# Altium PCB AudioPCB3.PcbDoc
Units mil, origin at the board's own origin, x right, y up, seen from the top; angles counter-clockwise.
Board outline 3937.01 x 3149.61 mil, 2 copper layers (Top Layer, Bottom Layer); 64 components, 36 nets, 148 pads, 0 vias.
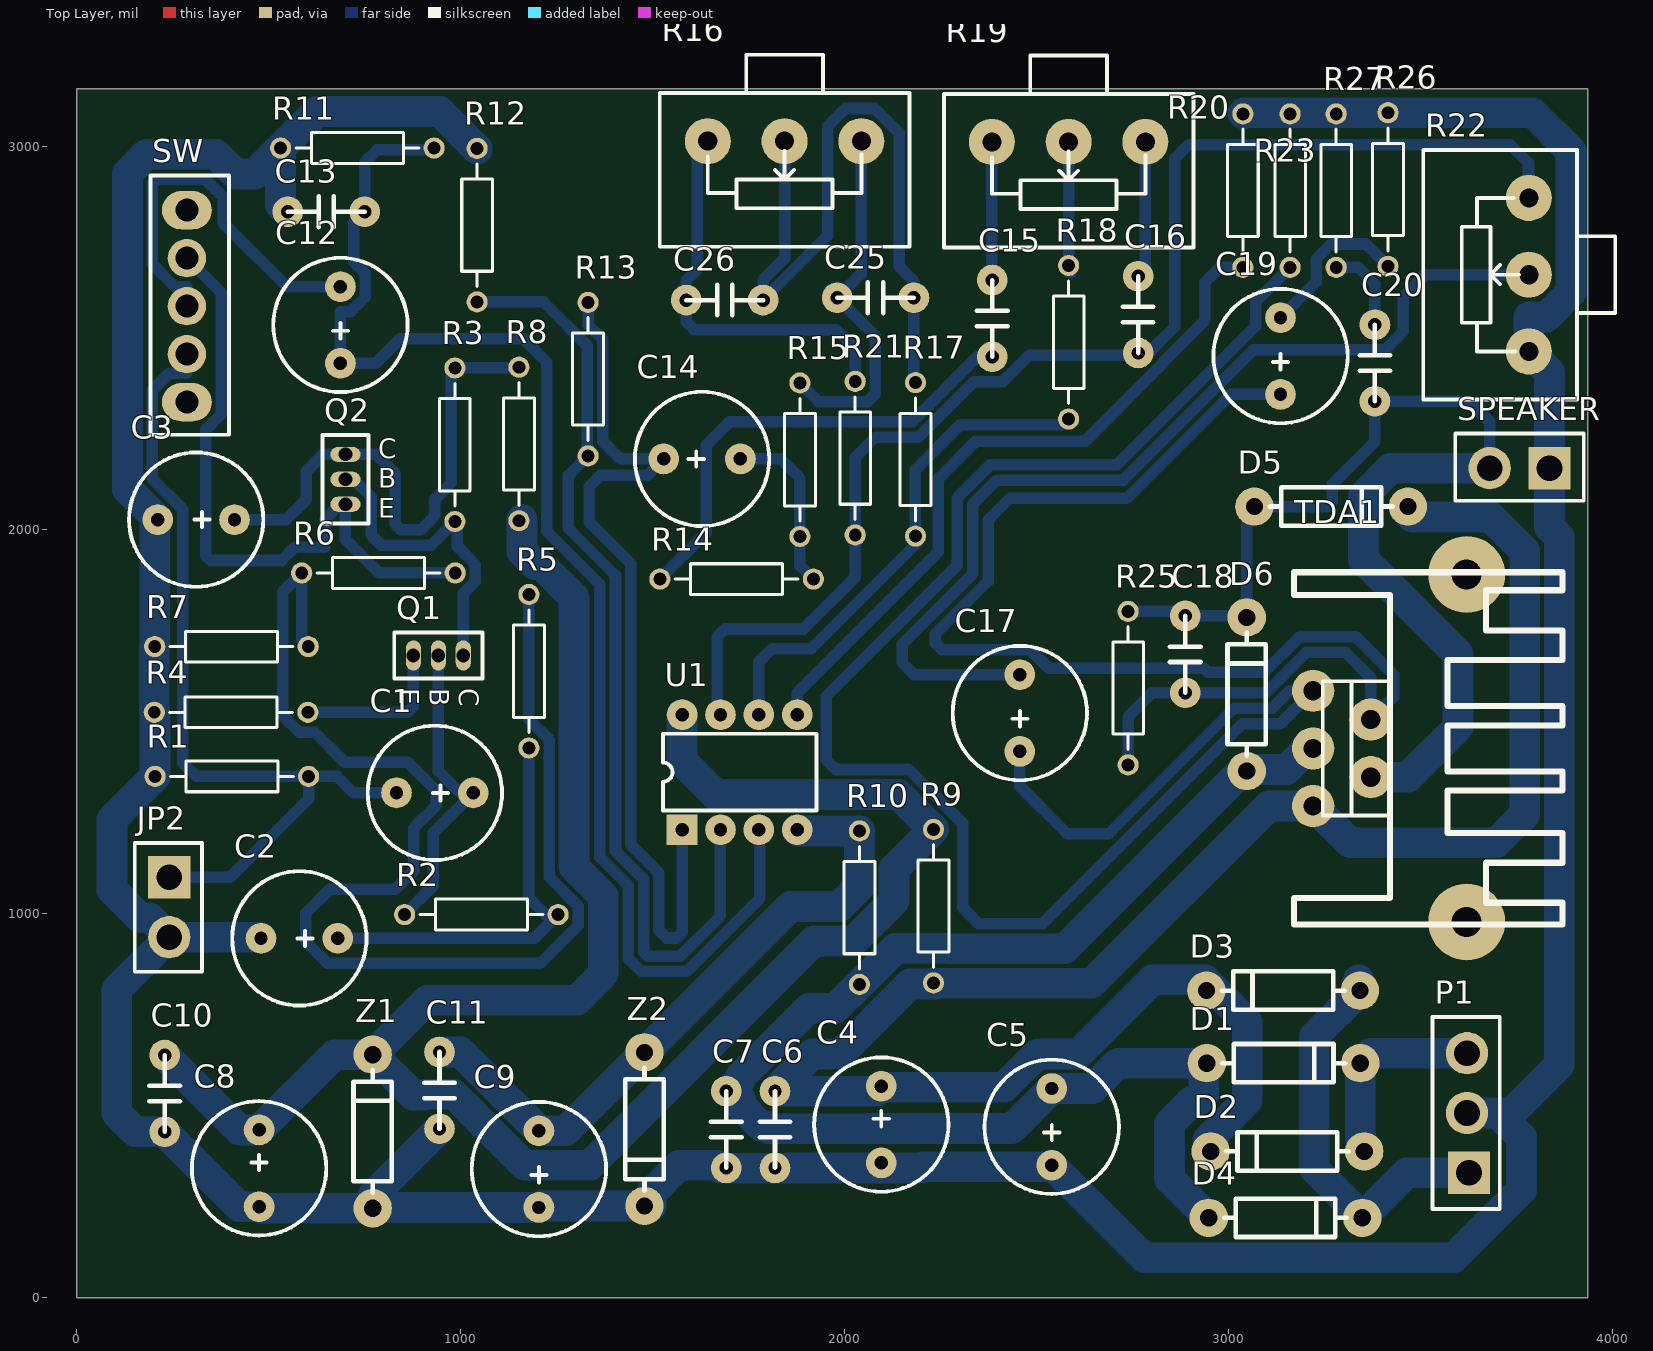
[diagram p0: Top Layer view]
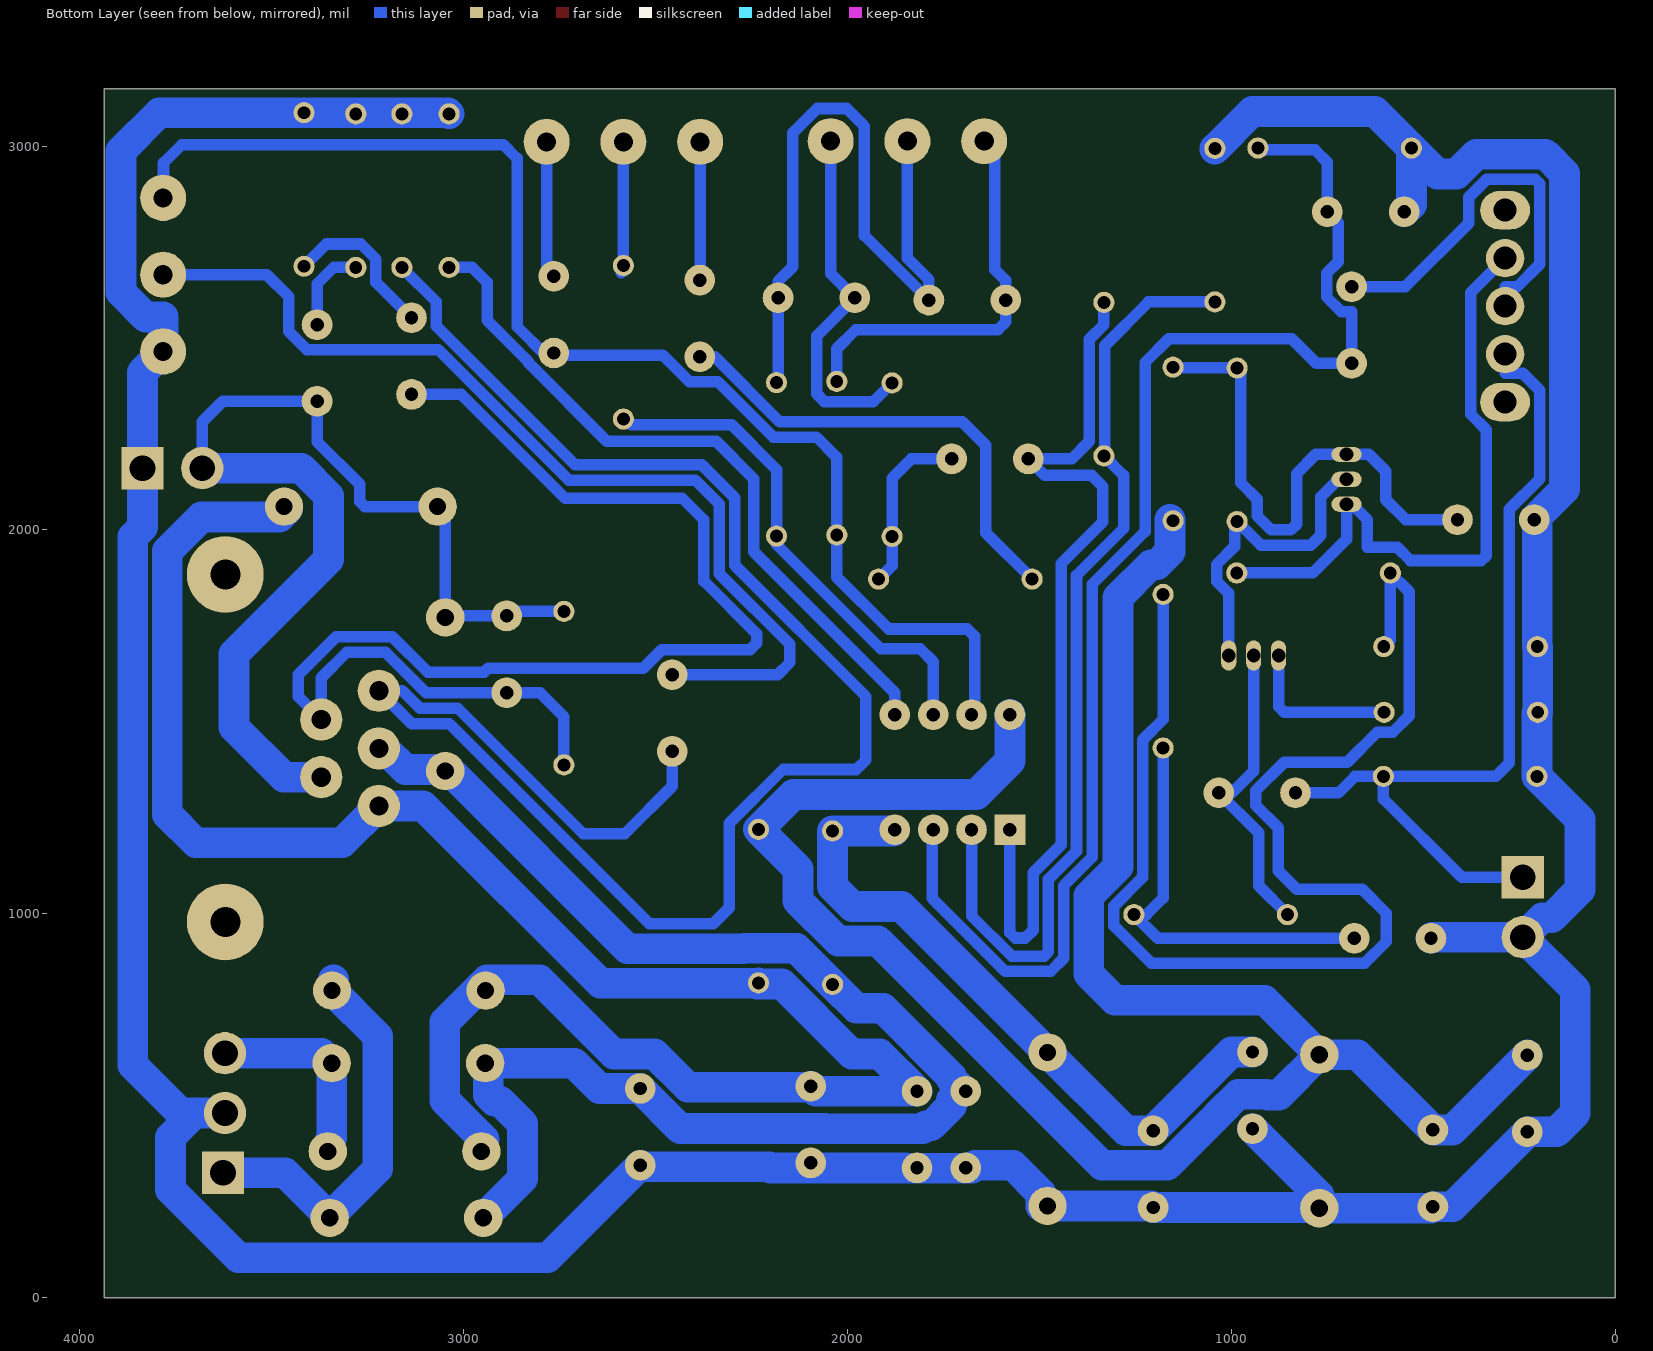
[diagram p1: Bottom Layer view, seen from below]

## Layer stack, top to bottom
Top Solder: solder mask 0.4, Solder Resist, Dk 3.5
Top Layer: signal copper 1.4
Dielectric 1: dielectric 12.6, FR-4, Dk 4.8
Bottom Layer: signal copper 1.4
Bottom Solder: solder mask 0.4, Solder Resist, Dk 3.5

## Board outline
0,0 3937.01,0 3937.01,3149.61 0,3149.61

## Design rules (kind name [scope] priority, off if disabled: settings)
Clearance [All] p1: gap=10 ignorepadtopadclearanceinfootprint=FALSE except(0: Arc-Hole Track-Hole SMDPad-Hole THPad-Hole Via-Hole Fill-Hole Poly-Hole Region-Hole Text-Hole)
PolygonConnect [All] p1: connectstyle=Relief reliefconductorwidth=10 reliefentries=4 polygonreliefangle="90 Angle" airgapwidth=10
RoutingVias [All] p1: holewidth=28 width=50 viastyle="Through Hole" minholewidth=28 minwidth=50 maxholewidth=28 maxwidth=50
SilkToSilkClearance [All] p1: silktosilkclearance=0
SilkToSolderMaskClearance [IsPad] p1: minsilkscreentomaskgap=0 clearancetoexposedcopper=TRUE
SolderMaskExpansion [All] p1: expansion=4
Width [All] p1: maxlimit=80 minlimit=30 preferedwidth=30 toplayer_maxwidth=30 minimp=50.000000 maximp=50.000000 favimp=50.000000
Width NETD3_1 [InNet('NetD3_1')] p2: maxlimit=80 minlimit=80 preferedwidth=80 minimp=50.000000 maximp=50.000000 favimp=50.000000
Width NETD1 [InNet('NetD1_2')] p3: maxlimit=80 minlimit=80 preferedwidth=80 minimp=50.000000 maximp=50.000000 favimp=50.000000
Width +9V_1 [InNet('+9V')] p4: maxlimit=80 minlimit=80 preferedwidth=80 minimp=50.000000 maximp=50.000000 favimp=50.000000
Width -9V [InNet('-9V')] p5: maxlimit=80 minlimit=80 preferedwidth=80 minimp=50.000000 maximp=50.000000 favimp=50.000000
Width GND [InNet('GND')] p6: maxlimit=80 minlimit=80 preferedwidth=80 minimp=50.000000 maximp=50.000000 favimp=50.000000
28 further rules are at their usual default settings.

## Components (designator, comment, footprint, x,y, rotation, side; value= is the part's Value field where it differs from the comment)
C1 "2U2" CD0.2 1033,1315 r180 top
C2 "2U2" CD0.2 680,936 r180 top
C3 "220U" CD0.2 411,2027 r180 top
C4 "2200U" CD0.2 2096,551 r270 top
C5 "2200U" CD0.2 2540,345 r90 top
C6 "0.1" C0.2A 1819,338 r90 top
C7 "0.1" C0.2A 1692,538 r270 top
C8 "220U" CD0.2 475,437 r270 top
C9 "220U" CD0.2 1204,235 r90 top
C10 "0.1" C0.2A 229,632 r270 top
C11 "0.1" C0.2A 945,440 r90 top
C12 "2.2U" CD0.2 687,2434 r90 top
C13 "470P" C0.2A 550,2829 r0 top
C14 "2.2U" CD0.2 1529,2185 r0 top
C15 "3300P" C0.2A 2385,2451 r90 top
C16 "3300P" C0.2A 2765,2661 r270 top
C17 "10U" CD0.2 2457,1423 r90 top
C18 "270P" C0.2A 2888,1576 r90 top
C19 "47U" CD0.2 3136,2353 r90 top
C20 "0.22U" C0.2A 3382,2535 r270 top
C25 "0.033U" C0.2A 1981,2605 r0 top
C26 "0.033U" C0.2A 1788,2599 r180 top
D1 "Diode 1N4001" DIODE0.4 2944,611 r0 top
D2 "Diode 1N4001" DIODE0.4 3354,381 r180 top
D3 "Diode 1N4001" DIODE0.4 3343,800 r180 top
D4 "Diode 1N4001" DIODE0.4 2949,208 r0 top
D5 "4148" DIODE0.4 3068,2061 r0 top
D6 "4148" DIODE0.4 3048,1372 r90 top
JP2 "Header 2" p2 241,939.09 r270 top
P1 "Header 3" p3 3622,481 r90 top
Q1 "9014" TO-226-AA 942,1673 r270 top
Q2 "9014" TO-226-AA 700,2132 r0 top
R1 "18K" AXIAL-0.4 404,1358 r0 top
R2 "20K" AXIAL-0.4 1054,998 r180 top
R3 "5K1" AXIAL-0.4 985,2222 r90 top
R4 "100" AXIAL-0.4 402,1525 r0 top
R5 "20K" AXIAL-0.4 1178,1632 r90 top
R6 "1K5" AXIAL-0.4 786,1888 r0 top
R7 "1K5" AXIAL-0.4 403,1696 r0 top
R8 "5.1K" AXIAL-0.4 1152,2224 r270 top
R9 "220" AXIAL-0.4 2232,1020 r90 top
R10 "220" AXIAL-0.4 2039,1016 r90 top
R11 "22K" AXIAL-0.4 731,2995 r0 top
R12 "22K" AXIAL-0.4 1043,2794 r270 top
R13 "220K" AXIAL-0.4 1332,2393 r90 top
R14 "10K" AXIAL-0.4 1719,1872 r0 top
R15 "10K" AXIAL-0.4 1884,2183 r90 top
R16 "100K" LK01 1844,3013 r0 top
R17 "10K" AXIAL-0.4 2185,2184 r90 top
R18 "3K3" AXIAL-0.4 2584,2489 r270 top
R19 "100K" LK01 2584,3011 r0 top
R20 "39K" AXIAL-0.4 3038,2884 r270 top
R21 "10K" AXIAL-0.4 2028,2187 r270 top
R22 "22K" LK01 3783,2665 r270 top
R23 "22K" AXIAL-0.4 3161,2884 r270 top
R25 "22K" AXIAL-0.4 2739,1588 r90 top
R26 "1K" AXIAL-0.4 3416,2887 r270 top
R27 "1K" AXIAL-0.4 3281,2884 r270 top
SPEAKER "Speaker" p2 3681,2161 r180 top
SW "SW-SPDT" SW 287,2583 r0 top
TDA1 "TDA2030" 7805E 3371,1531 r180 top
U1 "NE5532" DIP8 1577,1219 r90 top
Z1 "9V" DIODE0.4 771,233 r90 top
Z2 "9V" DIODE0.4 1479,639 r270 top

## Footprints (in the part's own frame and the unit in brackets; to place one, negate y for a bottom-side part, rotate by r counter-clockwise, add the part's x,y. Pads: shape width x height; smd on the part's side, far side on the other; paste and mask are expansions set on the pad)
7805E [mil]
  round 110 hole 50: 1(150,-50) 2(0,25) 3(150,100) 4(0,175) 5(150,250)
  round 200 hole 78: ""(-250,552) ""(-250,-353)
  silkscreen extent -500,-359 200,559
AXIAL-0.4 [mm]
  round 1.4 hole 0.85: 1(-5.08,0) 2(5.08,0)
  silkscreen extent -4.06,-1.02 4.06,1.02
C0.2A [mil]
  round 80 hole 35: 1(0,0) 2(200,0)
  silkscreen extent 0,-40 200,40
CD0.2 [mil]
  round 80 hole 35: 1(0,0) 2(200,0)
  silkscreen extent -75,-175 275,175
DIODE0.4 [mil]
  round 100 hole 45: 1(0,0) 2(400,0)
  silkscreen extent 40,-50 360,50
DIP8 [mil]
  rect 80x80 hole 35: 1(0,0)
  round 80 hole 35: 2(0,-100) 3(0,-200) 4(0,-300) 5(300,-300) 6(300,-200) 7(300,-100) 8(300,0)
  silkscreen extent 50,-350 250,50
LK01 [mil]
  round 120 hole 50: 1(200,0) 2(-200,0) 3(0,0)
  silkscreen extent -325,-275 325,225
p2 [mm]
  round 2.8 hole 1.7: 1(0,0)
  rect 2.8x2.8 hole 1.7: 2(-3.96,0)
  silkscreen extent -6.22,-2.29 2.29,2.16
p3 [mm]
  rect 2.8x2.8 hole 1.7: 1(-3.96,-0.127)
  round 2.8 hole 1.7: 2(0,0) 3(3.96,0)
  silkscreen extent -6.35,-2.16 6.35,2.29
SW [mil]
  round 100 hole 60: 1(0,125) 2(0,0) 3(0,-125)
  oval 130x100 hole 60: 4(0,250) 5(0,-250)
  silkscreen extent -95,-335 110,340
TO-226-AA [mm]
  oval 2x1 hole 0.9: 1(0,-1.651) 2(0,0) 3(0,1.651)
  silkscreen extent -1.52,-2.92 1.52,2.92

## Part data
C1 C2 C3 C4 C5 C8 C9 C12 C14 C17 C19: library part "Cap Pol1", "Polarized Capacitor (Radial)", LatestRevisionDate=17-Jul-2002, LatestRevisionNote="Re-released for DXP Platform.", PackageReference=RB7.6-15, Published=8-Jun-2000, Publisher="Altium Limited"
C6 C7 C10 C11 C13 C15 C16 C18 C20 C25 C26: library part Cap, "Capacitor", LatestRevisionDate=17-Jul-2002, LatestRevisionNote="Re-released for DXP Platform.", PackageReference=RAD-0.3, Published=8-Jun-2000, Publisher="Altium Limited"
D1 D2 D3 D4: "1 Amp General Purpose Rectifier", Code_JEDEC=DO-204-AL, ComponentLink1Description="Manufacturer Link", ComponentLink1URL=http://www.fairchildsemi.com/, ComponentLink2Description=Datasheet, ComponentLink2URL=http://www.fairchildsemi.com/ds/1N%2F1N4001.pdf, DatasheetVersion=1998, LatestRevisionDate=17-Jul-2002, LatestRevisionNote="Re-released for DXP Platform.", PackageReference=DO-41, PackageVersion=Aug-1999, Published=8-Jun-2000, Publisher="Altium Limited"
D5 D6: library part "Diode 1N4148", "High Conductance Fast Diode", Code_JEDEC=DO-204-AH, ComponentLink1Description="Manufacturer Link", ComponentLink1URL=http://www.fairchildsemi.com/, ComponentLink2Description=Datasheet, ComponentLink2URL=http://www.fairchildsemi.com/ds/1N%2F1N4148.pdf, DatasheetVersion=1997, LatestRevisionDate=17-Jul-2002, LatestRevisionNote="Re-released for DXP Platform.", PackageReference=DO-35, Published=8-Jun-2000, Publisher="Altium Limited"
JP2: "Header, 2-Pin", LatestRevisionDate=17-Jul-2002, LatestRevisionNote="Re-released for DXP Platform.", Publisher="Altium Limited"
P1: "Header, 3-Pin", LatestRevisionDate=17-Jul-2002, LatestRevisionNote="Re-released for DXP Platform.", Publisher="Altium Limited"
Q1 Q2: library part 2N3904, "NPN General Purpose Amplifier", Code_JEDEC=TO-92A, ComponentLink1Description="Manufacturer Link", ComponentLink1URL=http://www.fairchildsemi.com/, ComponentLink2Description=Datasheet, ComponentLink2URL=http://www.fairchildsemi.com/ds/2N%2F2N3904.pdf, DatasheetVersion=1997, LatestRevisionDate=15-Jan-2003, LatestRevisionNote="PCB Footprint 'BCY-W3/D4.7' replaced", PackageReference=TO-92A, PackageVersion=Sep-1998, Published=8-Jun-2000, Publisher="Altium Limited"
R1 R2 R3 R4 R5 R6 R7 R8 R9 R10 R11 R12 R13 R14 R15 R17 R18 R20 R21 R23 R25 R26 R27: library part Res2, "Resistor", LatestRevisionDate=17-Jul-2002, LatestRevisionNote="Re-released for DXP Platform.", PackageReference=AXIAL-0.4, Published=8-Jun-2000, Publisher="Altium Limited"
R16 R19 R22: library part RPot, "Potentiometer", LatestRevisionDate=17-Jul-2002, LatestRevisionNote="Re-released for DXP Platform.", PackageDescription="Variable Resistor, Thru-Hole; 3 Leads", PackageReference=VR5, Published=8-Jun-2000, Publisher="Altium Limited", Set Position=0.5, Sim Note="Enter the Resistance value and the set point into parameter fields."
SPEAKER: "Loudspeaker", LatestRevisionDate=17-Jul-2002, LatestRevisionNote="Re-released for DXP Platform.", PackageReference=PIN2, Published=24-Mar-1999, Publisher="Altium Limited"
SW: "SPDT Subminiature Toggle Switch, Right Angle Mounting, Vertical Actuation", ComponentLink1Description="Manufacturer Link", ComponentLink1URL=http://www.apem.com, DatasheetVersion=05-Dec-2000, LatestRevisionDate=17-Dec-2003, LatestRevisionNote="Schematic revised, PCB Footprint replaced.", PackageReference=TL36WW15050, Published=24-Mar-1999, Publisher="Altium Limited"
Z1 Z2: library part "D Zener", "Zener Diode", LatestRevisionDate=17-Jul-2002, LatestRevisionNote="Re-released for DXP Platform.", PackageReference=DIODE-0.7, Published=8-Jun-2000, Publisher="Altium Limited"

## Nets (pads, with @x,y where several pads share a name; then routed paths per layer and width w, separated by ;. In a path a pad name is that pad's centre, name@x,y a point inside that pad or via, vN(x,y) a via of type N, cw(c..) or ccw(c..) an arc to the next point about the centre after c; other vN are vias at no path point)
+9V: C8.1 C10.1 R8.2 R9.2 U1.8 Z1.2 | length 5515.5
  Bottom Layer w80: C10.1 424,437 C8.1 671,633 Z1.2 ; R8.2@1160,2027 1160,1943.56 1194,1909.56 1210.13,1909.56 1295.56,1824.13 1295.56,1122.7 1371.56,1046.69 1371.56,843.56 1303,775 913,775 Z1.2 ; U1.8 1577,1398 1664,1311 2141,1311 R9.2 2129,1117 2129,1033.72 2024.28,929 1921,929 1337,345 1166.72,345 1035,476.72 1035,477.28 982.28,530 907.72,530 905.72,528 876,528 Z1.2
-9V: C9.2 C11.2 R10.2 U1.4 Z2.1 | length 1750.9
  Bottom Layer w30: U1.4 U1.4@1880,1216
  Bottom Layer w80: C11.2 999.56,640 1204,435.56 C9.2 1275,435 Z2.1 1859,1019 1987,1019 2039,1071 R10.2 U1.4@1880,1216
GND: C2.2 C3.2 C4.2 C5.1 C6.1 C7.2 C8.2 C9.1 C10.2 C11.1 C13.1 JP2.1 P1.2 R1.1 R4.1 R7.1 R11.1 R12.1 R20.1 R22.1 R23.1 R26.1 R27.1 SPEAKER.2 Z1.1 Z2.2 | length 12314.6
  Bottom Layer w80: C2.2 476.91,939.09 JP2.1 ; C13.1 531,2848 R11.1 ; C11.1 771,266 Z1.1 ; R12.1 1043,2992.68 945.68,3090 626,3090 R11.1 ; Z2.2 1208,239 C9.1 773,235 Z1.1 ; Z2.2@1497,239 1497,273 1569,345 1668,345 1676,337 1819,337 1850,337 1851,338 2201,338 2204,341 C5.1@2544,341 ; C5.1 C5.1@2544,341 ; R20.1 3041,3087 3793,3087 3893,2987 3893,2619.44 3828.56,2555 3783,2555 R22.1 3836.91,2411.09 SPEAKER.2 3836.91,2007.51 3862,1982.41 3862,606 3737,481 3701,481 ; P1.2 3701,481 ; JP2.1 190.21,989.88 165.17,989.88 92,1063.05 92,1246 R1.1 204,1523 R4.1 202,1695 R7.1 203,2019 C3.2 132,2106 132,2928.96 182.08,2979.03 361.89,2979.03 413.48,2927.44 463.44,2927.44 R11.1 ; JP2.1 104,802.09 104,481 153,432 C10.2 424,237 C8.2 479,233 Z1.1 ; C5.1@2544,341 2781,104 3586.85,104 3764,281.15 3764,418 3701,481
NetC1_1: C1.1 Q1.2 R2.2 | length 806.8
  Bottom Layer w30: R2.2 929,1073 929,1211 C1.1 999,1315 942,1372 Q1.2
NetC1_2: C1.2 JP2.2 R1.2 SW.3 | length 2257.8
  Bottom Layer w30: JP2.2 400,1095 604,1299 R1.2 ; SW.3 287,2408 240.93,2408 197,2364.07 197,2132.92 276,2053.92 276,1393 311,1358 R1.2 ; C1.2 721,1315 678,1358 R1.2
NetC2_1: C2.1 R2.1 R5.1 | length 1084.5
  Bottom Layer w30: C2.1 1192,936 R2.1 1221,998 1178,1041 R5.1
NetC3_1: C3.1 Q2.3 R3.2 R8.1 | length 1393.6
  Bottom Layer w30: C3.1 546,2027 598,2079 598,2153 642,2197 Q2.3 780,2197 830,2147 830,2015 845,2000 896,2000 932.44,2036.44 932.44,2080 976,2123.56 976,2413 R3.2 1155,2422 R8.1@1160,2427
NetC12_1: C12.1 C13.2 R11.2 U1.3 | length 3631.9
  Bottom Layer w30: R11.2 926,2990 782,2990 750,2958 C13.2 721.92,2800.92 721.92,2699 752,2668.92 752,2607.08 713.92,2569 687,2569 C12.1 779,2434 843,2498 1163.33,2498 1225,2436.33 1225,1996 1363,1858 1363,1147.18 1436.56,1073.62 1436.56,884.44 1471,850 1589,850 1779,1040 1779,1217 U1.3
NetC12_2: C12.2 SW.2 | length 1025.3
  Bottom Layer w30: SW.2 287,2633 255.93,2633 197,2691.94 197,2902.03 209,2914.03 334.97,2914.03 382,2867 382,2798.94 546.94,2634 C12.2
NetC14_1: C14.1 R13.2 U1.1 | length 2353
  Bottom Layer w30: R13.2 1332,2534.57 1370,2496.57 1370,2231 1416,2185 C14.1 1486,2142 1364,2142 1335,2113 1335,2021 1443.5,1912.5 1443.5,1179.81 1516.56,1106.76 1516.56,957.44 1537,937 1562.86,937 1577,951.14 U1.1
NetC14_2: C14.2 R14.2 R15.1 | length 453.2
  Bottom Layer w30: C14.2 1834,2185 1884,2135 R15.1 1884,1907 R14.2
NetC15_1: C15.1 R14.1 | length 1239.4
  Bottom Layer w30: R14.1 1640,1993 1640,2221 1701,2282 2177,2282 2346,2451 C15.1
NetC15_2: C15.2 R19.2 | length 360.4
  Bottom Layer w30: R19.2 2384,2652 C15.2
NetC16_1: C16.1 R19.1 | length 355.7
  Bottom Layer w30: R19.1 2784,2661 C16.1@2788,2657
NetC16_2: C16.2 R21.2 R22.2 U1.7 | length 3401.4
  Bottom Layer w30: U1.7 1669,1527 1669,1723 1688,1742 1893,1742 2028,1877 R21.2 2028,2189 2081,2242 2193.57,2242 2337.57,2386 2411.92,2386 2481,2455.08 2786.08,2455.08 2861,2530 2861,2967.79 2897.21,3004 3734,3004 3782,2956 3782,2866 R22.2
NetC17_1: C17.1 R23.2 TDA1.1 | length 4863.3
  Bottom Layer w30: C17.1 2457,1332 2580,1209 2689,1209 3016,1536 3114.57,1536 3159.57,1581 TDA1.1 3135,1495 3037,1495 2516,974 2350,974 2308,1016 2308,1235.92 2167.92,1376 1977,1376 1952,1401 1952,1566 2294,1908 2294,2084 2380,2170 2710,2170 3071,2531 3071,2594 R23.2
NetC17_2: C17.2 R22.3 | length 2558.7
  Bottom Layer w30: C17.2 2182,1623 2150,1655 2150,1702 2334,1886 2334,2067.43 2396.57,2130 2726.57,2130 3066.57,2470 3408.92,2470 3456,2517.08 3456,2608 3513,2665 R22.3
NetC18_1: C18.1 C19.1 R25.1 TDA1.2 | length 3685.6
  Bottom Layer w30: R25.1 2739,1514 2801,1576 C18.1 3098,1576 3203,1681 3305,1681 3371,1615 TDA1.2 3431,1566 3431,1623 3332,1722 3186,1722 3093,1629 2947,1629 2936,1640 2531.92,1640 2483.92,1688 2254,1688 2237,1705 2237,1730 2374,1867 2374,2026 2430,2082 2735.14,2082 3006.14,2353 C19.1
NetC18_2: C18.2 C20.2 D5.1 D6.2 R25.2 SPEAKER.1 TDA1.4 | length 2915
  Bottom Layer w30: R25.2 2876,1788 C18.2 3044,1776 D6.2 3048,2041 D5.1 3258,2061 3271,2074 3271,2119 3382,2230 C20.2 3628,2335 3681,2282 SPEAKER.1
  Bottom Layer w80: TDA1.4 3468,1356 3598.22,1486.22 3598.22,1676.78 3352,1923 3352,2089 3424,2161 SPEAKER.1
NetC19_2: C19.2 R26.2 | length 418.9
  Bottom Layer w30: C19.2 3228.44,2645.44 3228.44,2705.77 3267.67,2745 3358,2745 R26.2
NetC20_1: C20.1 R27.2 | length 224.8
  Bottom Layer w30: R27.2 3339,2684 3382,2641 C20.1
NetC25_1: C25.1 R15.2 R16.1 | length 950.7
  Bottom Layer w30: R15.2 1932.56,2334.44 2060.33,2334.44 2080.56,2354.67 2080.56,2505.44 C25.1 2044,2668 R16.1
NetC25_2: C25.2 C26.1 R16.3 R17.2 | length 1859.9
  Bottom Layer w30: R16.3 1844,2708 1788,2652 C26.1 1956,2767 1956,3052 2002,3098 2079.21,3098 2143,3034.21 2143,2686 2181,2648 C25.2 2181,2388 R17.2
NetC26_2: C26.2 R16.2 R21.1 | length 1048.2
  Bottom Layer w30: R16.2 1616,2985 1616,2678 1588,2650 C26.2 1588,2542 1608,2522 1978,2522 2028,2472 R21.1
NetD1_2: D1.2 D2.1 P1.3 | length 489
  Bottom Layer w80: D2.1@3347,412 3344,415 D1.2 3369.91,636.91 P1.3
NetD3_1: D3.1 D4.2 P1.1 | length 1051.1
  Bottom Layer w80: D3.1@3339,828 3339,800 D3.1 3224,681 3224,336 3349,211 D4.2@3349,209.19 ; D4.2 D4.2@3349,209.19 ; P1.1 3464.91,325.09 D4.2@3349,209.19
NetQ1_1: Q1.1 R4.2 | length 414.2
  Bottom Layer w30: R4.2 862,1525 877,1540 Q1.1
NetQ1_3: Q1.3 Q2.2 R3.1 | length 825.5
  Bottom Layer w30: Q2.2 721,2132 767,2086 767,1986 793,1960 923,1960 R3.1 991,2016 991,1956 992.33,1956 1038.56,1909.77 1038.56,1866.23 1007,1834.67 Q1.3
NetQ2_1: Q2.1 R6.2 SW.1 | length 1714.5
  Bottom Layer w30: SW.1 377,2618 377,2301.94 336,2260.94 336,1933 348.56,1920.44 533.44,1920.44 568,1955 645.56,1955 645.56,2026.56 686,2067 Q2.1 700,1976 788,1888 R6.2
NetR5_2: R5.2 R6.1 R7.2 | length 3398.5
  Bottom Layer w30: R7.2@604,1697 R7.2 586,1713 R6.1 537,1839 537,1515.67 580.23,1472.44 620.56,1472.44 698,1395 862.43,1395 937,1320.43 937,1283 878,1224 878,1112 830,1064 659,1064 596,1001 596,928.08 653.08,871 1208.12,871 1306.56,969.44 1306.56,1019.77 1230.56,1095.77 1230.56,1453.77 1178,1506.33 R5.2
NetR12_2: R12.2 R13.1 U1.2 | length 2488.9
  Bottom Layer w30: R12.2 1216,2594 1330,2480 1330,2195 R13.1 1281,2142 1281,2004 1403.5,1881.5 1403.5,1163.25 1476.56,1090.19 1476.56,901.01 1487.57,890 1572.43,890 1677,994.57 U1.2
NetR17_1: R17.1 R18.2 U1.6 | length 1295.8
  Bottom Layer w30: U1.6 1777,1657 1811,1691 1914,1691 2185,1962 R17.1 2185,2157 2302,2274 R18.2@2565,2274
NetR18_1: R18.1 R19.3 | length 343.1
  Bottom Layer w30: R19.3 2584,2675 R18.1@2589,2670
NetR20_2: R20.2 U1.5 | length 1848
  Bottom Layer w30: U1.5 1877,1576 2244,1943 2244,2133 2342,2231 2626.92,2231 2830,2434.08 2830,2437 2939,2546 2939,2645 2978,2684 R20.2
VCC: C4.1 C6.2 D2.2 D3.2 D5.2 R9.1 TDA1.5 | length 5128.8
  Bottom Layer w80: R9.1 R9.1@2233,819 ; D2.2@2947,412 3049,514 3049,718 2939,828 2802,828 2609,635 2502.72,635 2416,548.28 2098.72,548.28 C4.1 2083,538 C6.2 1916,635 1989,635 2171,817 2235,817 R9.1@2233,819 ; D5.2@3458,2056 3480,2034 3683.13,2034 3772,1945.13 3772,1259 3698,1185 3317,1185 TDA1.5 3106,1281 2644,819 R9.1@2233,819
VSS: C5.2 C7.1 D1.1 D4.1 D6.1 R10.1 TDA1.3 | length 3745.6
  Bottom Layer w80: D1.1 D1.1@2936,611 ; D4.1 2847,310 2847,453.42 2905.58,512 2919.72,512 2936,528.28 D1.1@2936,611 ; TDA1.3 3207,1431 3152,1376 3040,1376 2573,909 2270.28,909 2269.28,910 2133,910 R10.1 1977,754 1907.72,754 1729,575.28 1729,569 1702,542 1729,515 1729,500.72 1781.72,448 1796,448 1804,440 2057.72,440 2058.72,441 2436,441 C5.2 2646.28,545 2712.28,611 D1.1@2936,611
pads on no net: SW.4 SW.5 TDA1.

## Text inside footprints (layer, text, board x,y; h text height)
Q1: Top Overlay "E" at 842,1588 h50 r270; Top Overlay "B" at 919.5,1588 h50 r270; Top Overlay "C" at 997,1588 h50 r270
Q2: Top Overlay "E" at 785,2032 h50; Top Overlay "B" at 785,2109.5 h50; Top Overlay "C" at 785,2187 h50